# Altium PCB PCB1.PcbDoc
Units mil, origin at the board's own origin, x right, y up, seen from the top; angles counter-clockwise.
Board outline 3800 x 3250 mil, 2 copper layers (Top Layer, Bottom Layer); 24 components, 35 nets, 120 pads, 8 vias.
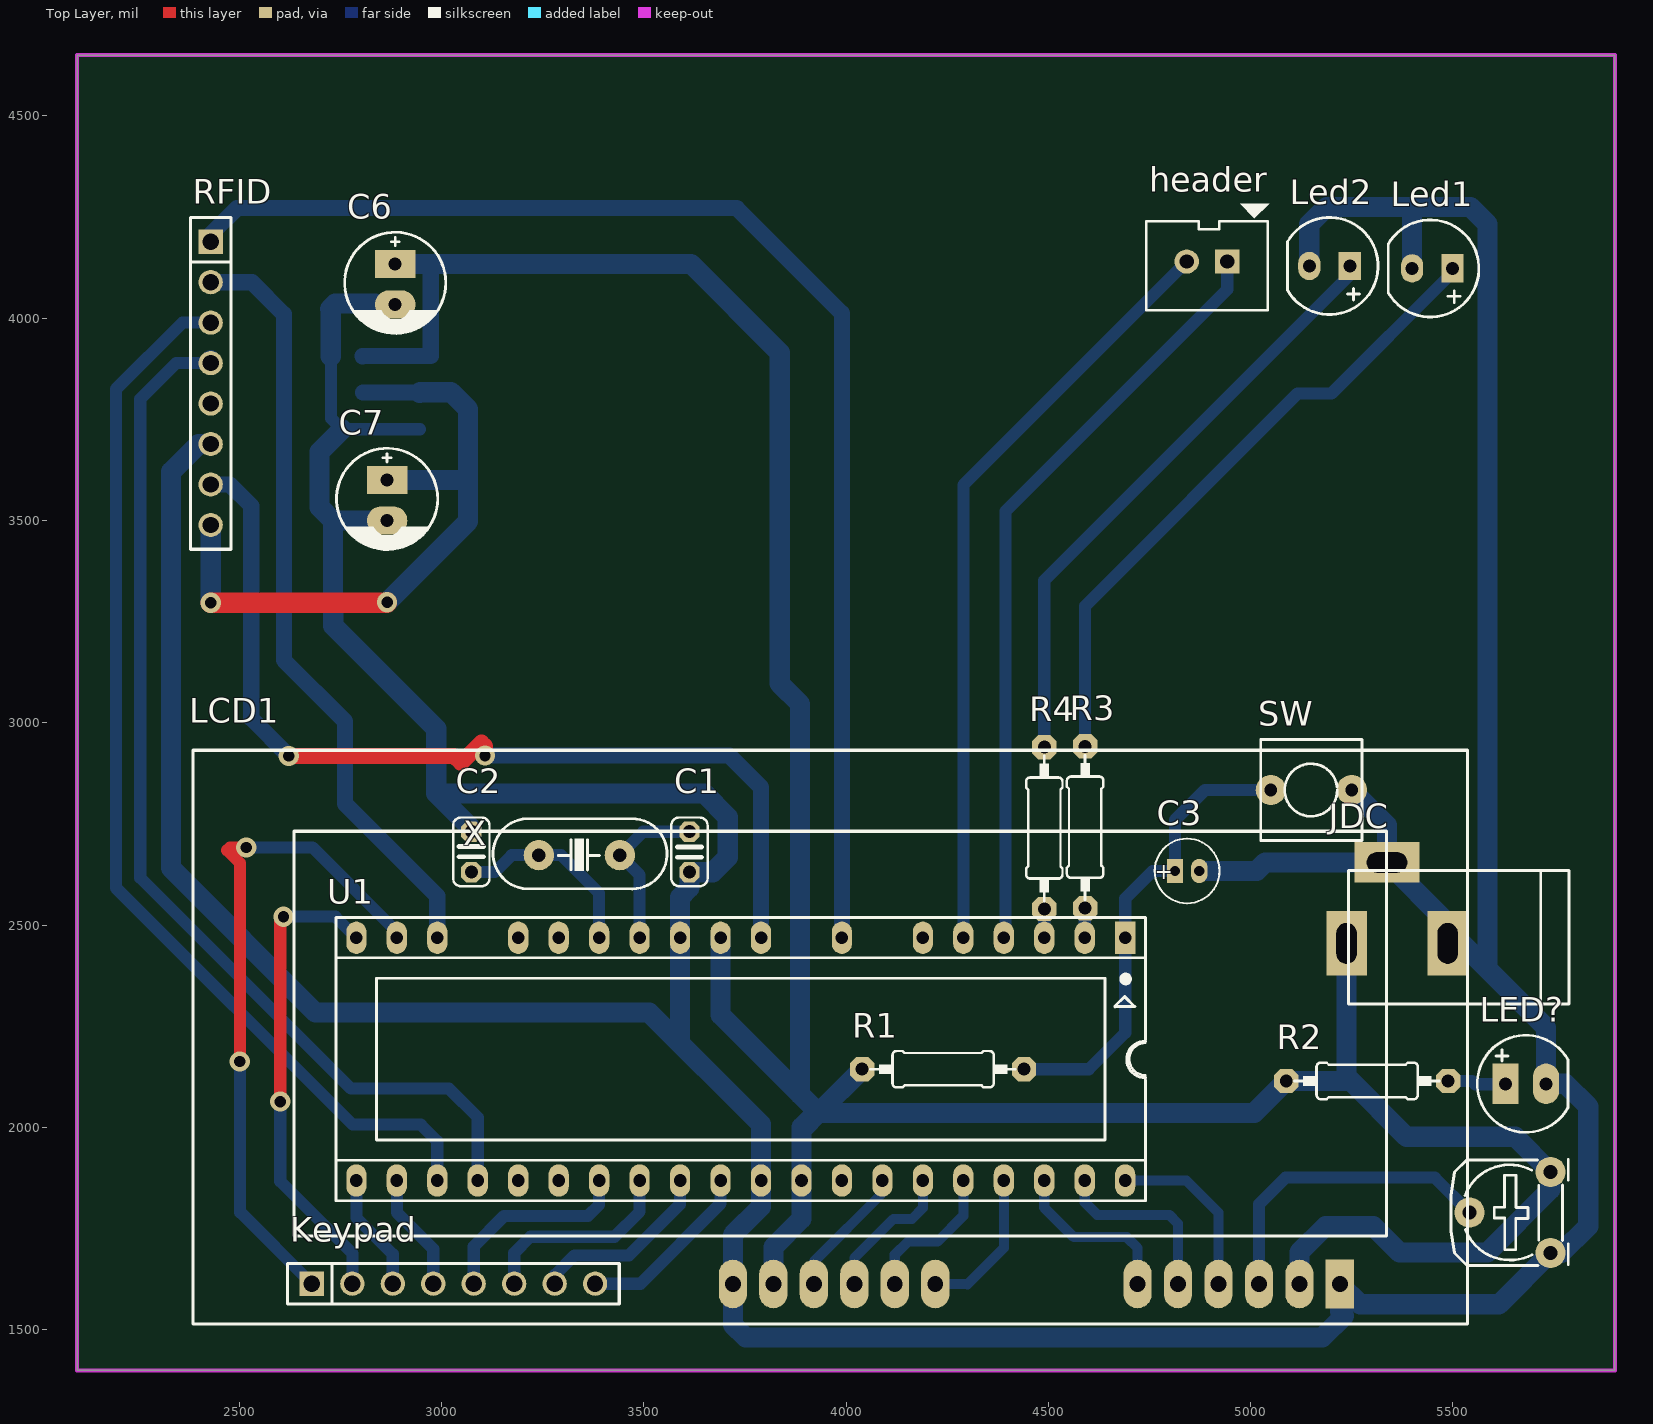
[diagram p0: Top Layer view]
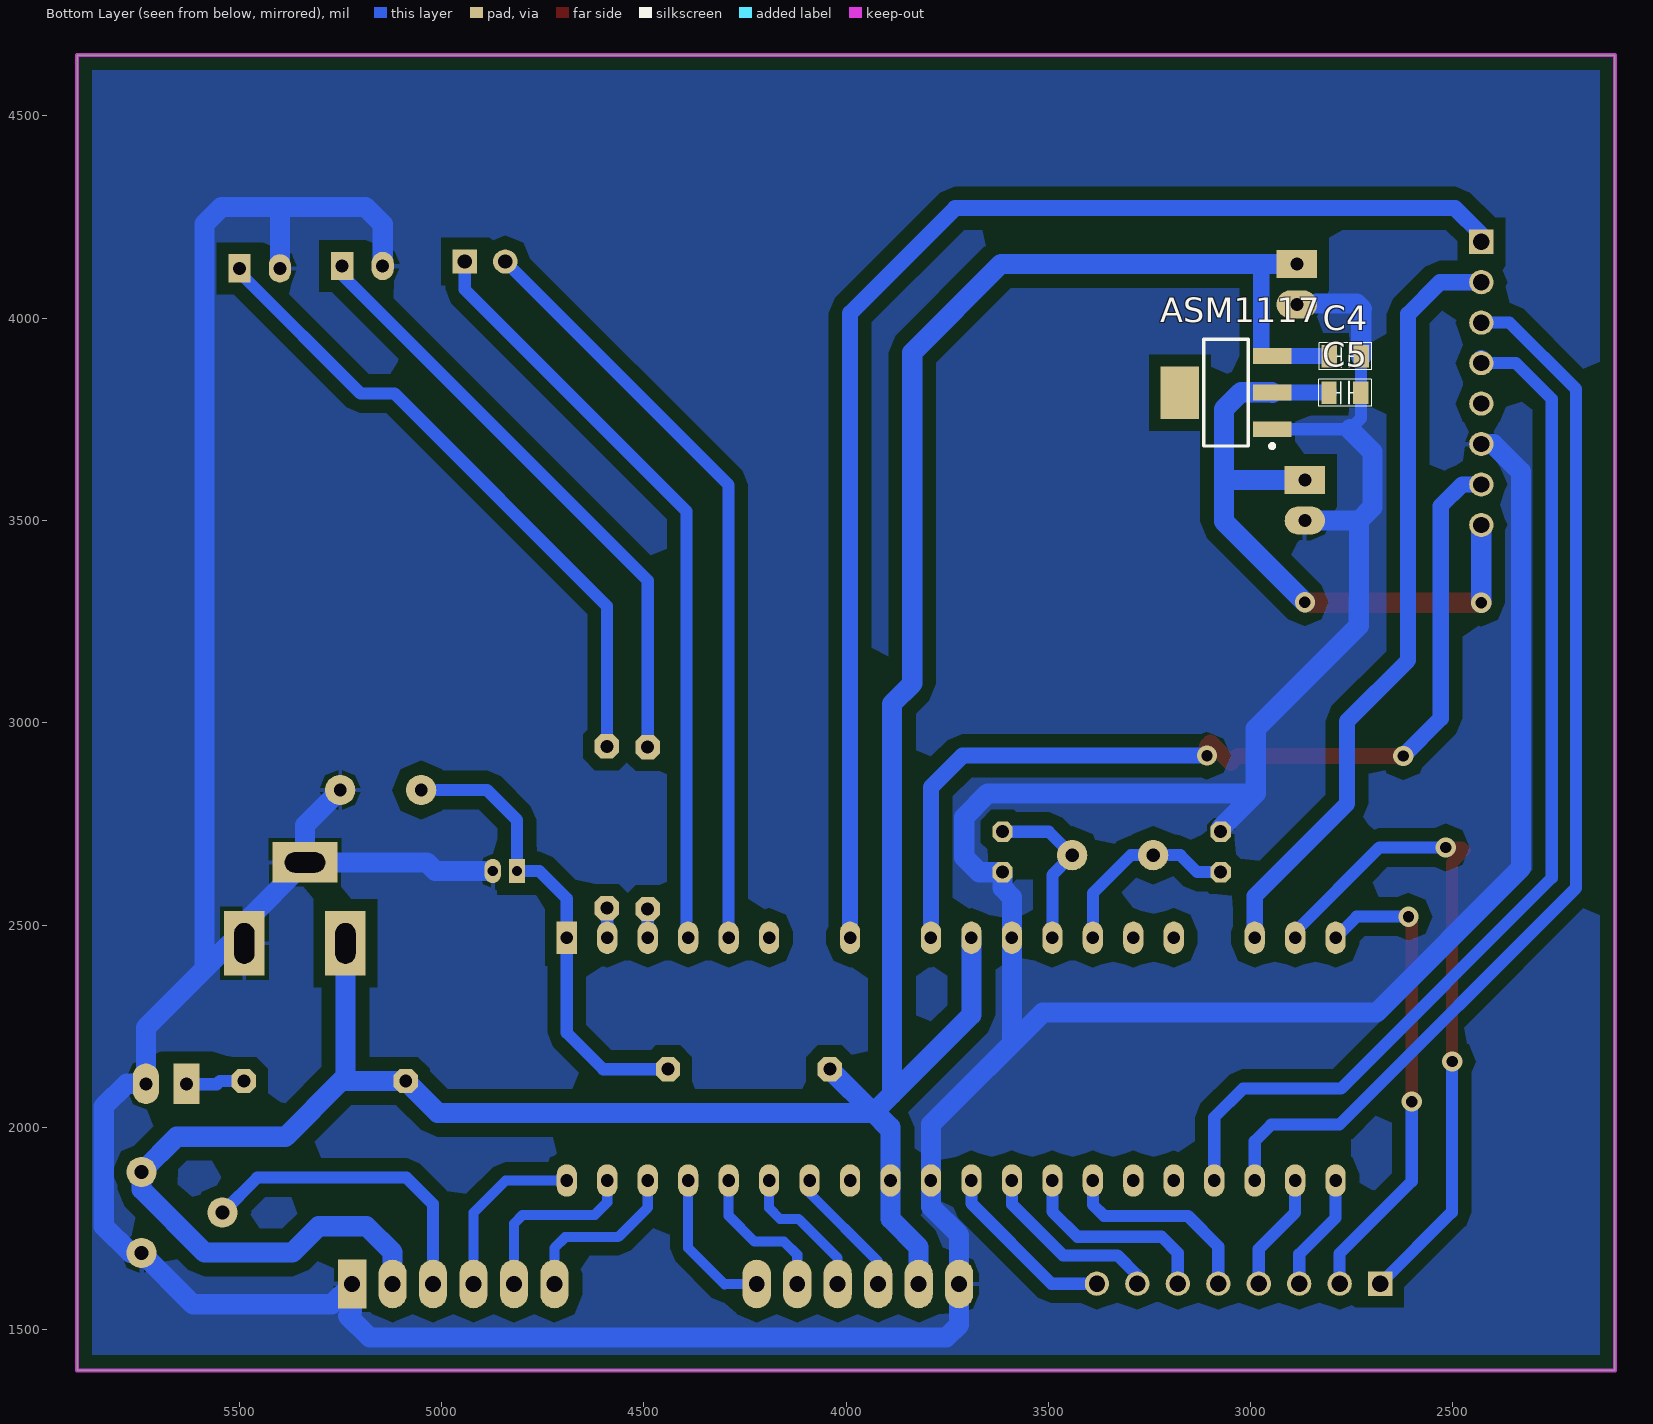
[diagram p1: Bottom Layer view, seen from below]
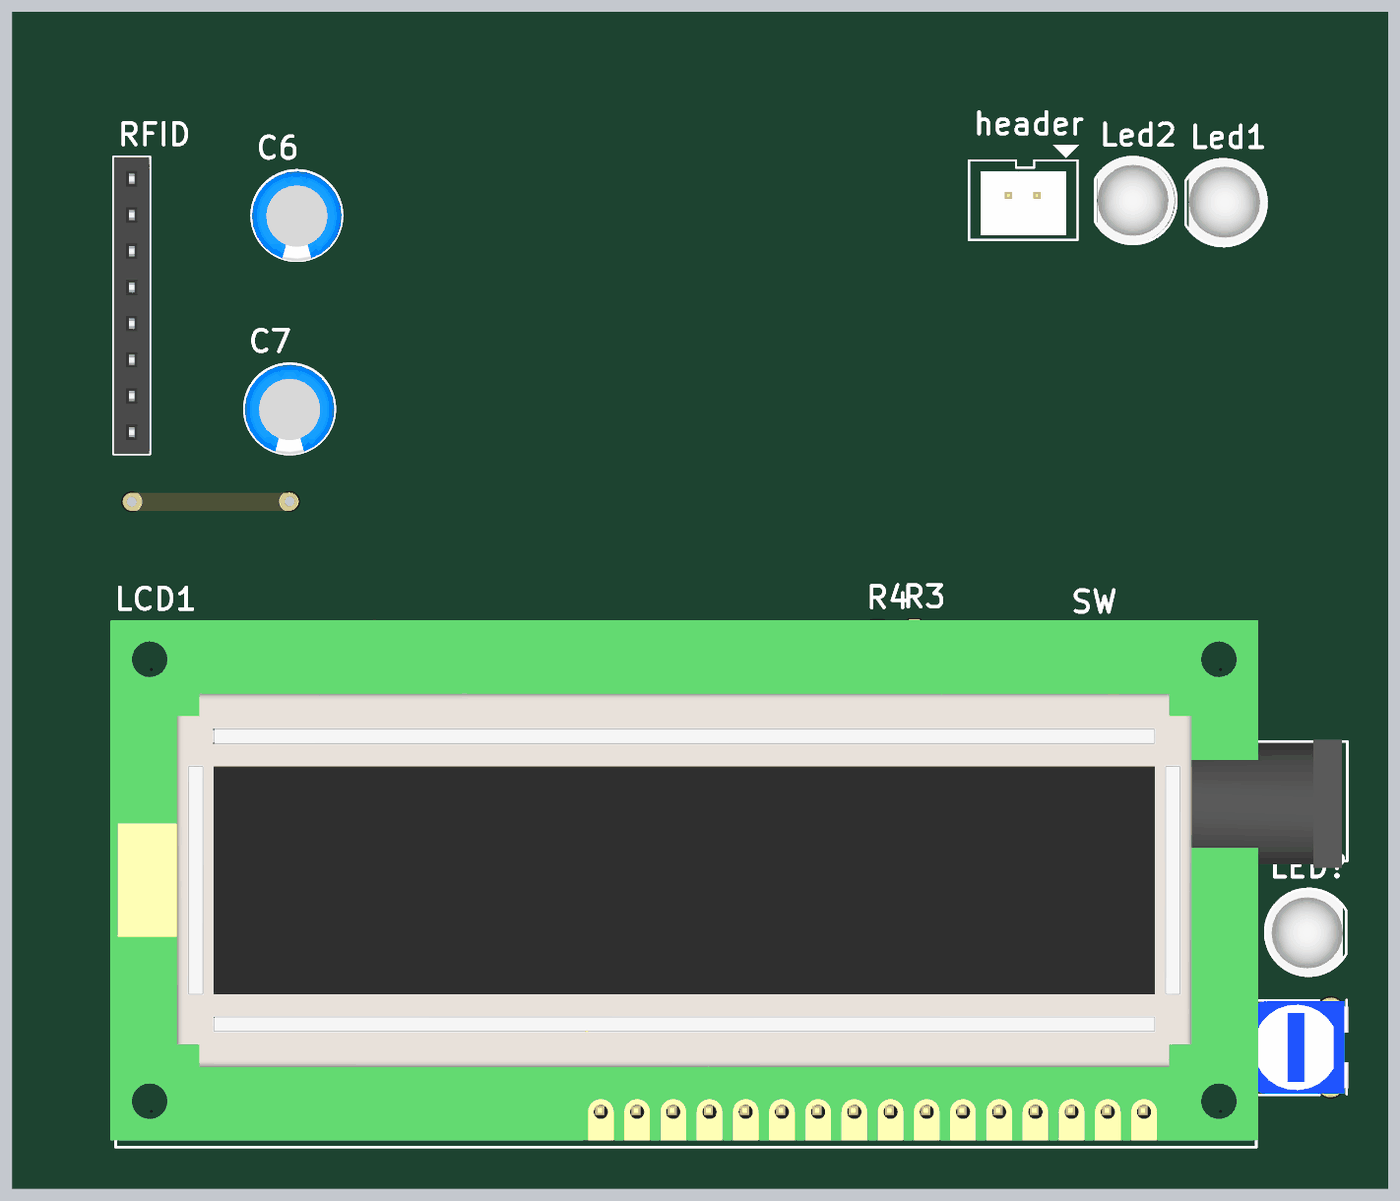
[diagram p2: 3D render of the assembled board from above, using the file's embedded part models]
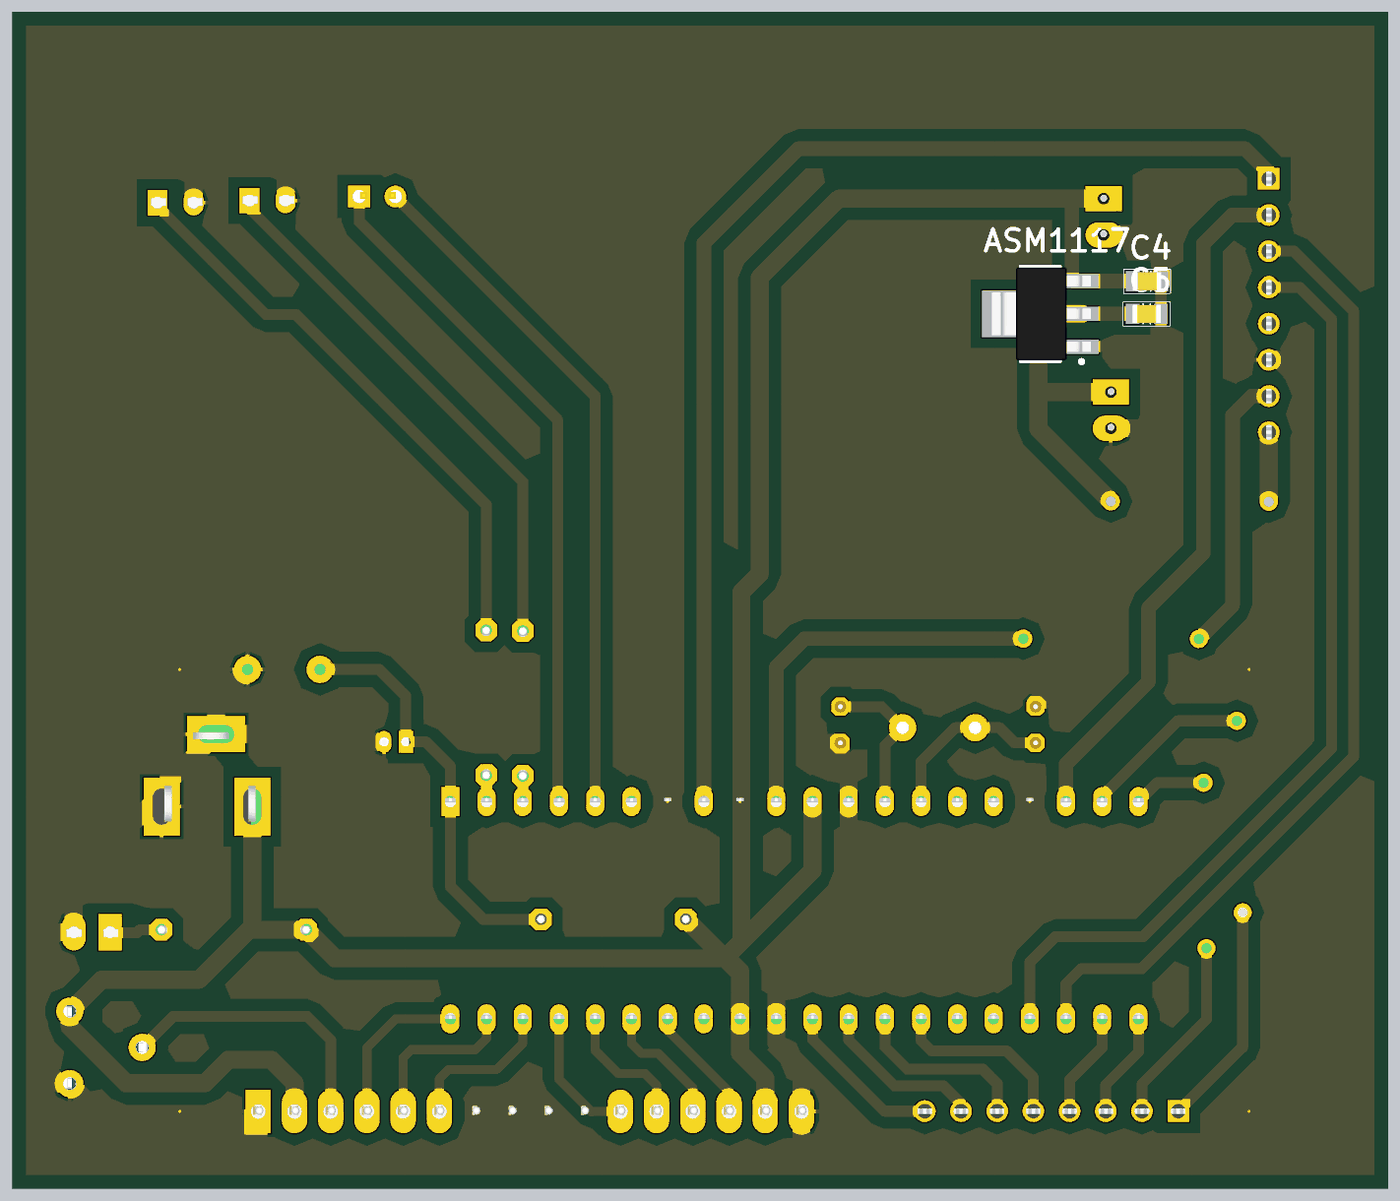
[diagram p3: 3D render of the assembled board from below, using the file's embedded part models]

## Layer stack, top to bottom
Top Solder: solder mask 0.4, Solder Resist, Dk 3.5
Top Layer: signal copper 1.4
Dielectric 1: dielectric 12.6, FR-4, Dk 4.8
Bottom Layer: signal copper 1.4
Bottom Solder: solder mask 0.4, Solder Resist, Dk 3.5

## Board outline
2100,1400 2100,4650 5900,4650 5900,1400

## Design rules (kind name [scope] priority, off if disabled: settings)
Clearance [All] p1: gap=30
PolygonConnect [All] p1: connectstyle=Relief reliefconductorwidth=10 reliefentries=4 polygonreliefangle="90 Angle" airgapwidth=10
RoutingVias [All] p1: holewidth=28 width=50 viastyle="Through Hole" minholewidth=28 minwidth=50 maxholewidth=28 maxwidth=50
SolderMaskExpansion [All] p1: expansion=4
Width [All] p1: maxlimit=50 minlimit=10 preferedwidth=30
30 further rules are at their usual default settings.

## Classes and differential pairs
component class Sheet1: ASM1117 C1 C2 C3 C4 C5 C6 C7 header JDC Keypad LCD1 Led1 Led2 LED? R1 R2 R3 R4 RFID SW

## Components (designator, comment, footprint, x,y, rotation, side; value= is the part's Value field where it differs from the comment)
ASM1117 "" SOT223 3061,3816 r90 bottom
C1 "22p" C025-025,040 3613,2731 r270 top
C2 "22p" C025-025,040 3074,2631 r90 top
C3 "0.1uF" CA-040,015 4813,2634 r0 top
C4 "100nF" C-0805 2766,3906 r180 bottom
C5 "100nF" C-0805 2767,3816 r180 bottom
C6 "100uF" CP1/2.5 2886,4134 r270 top
C7 "100uF" CP1/2.5 2866,3600 r270 top
header "Header2" Header2 5272,4145 r180 top
JDC "Jac DC" DC-IN 5362,2555 r180 top
Keypad "JP8" JP8-C1T 2680,1614 r0 top
LCD1 "LCD16x2A" LCD16X2 5220.55,1613.17 r180 top
Led1 "LEDA" L-5G 5499,4123 r180 top
Led2 "LEDA" L-5R 5245,4129 r180 top
LED? "LED" LED-5-Green 5630,2108 r0 top
R1 "Res" R-025,100 4040,2144 r0 top
R2 "Res" R-025,100 5088,2115 r0 top
R3 "Res" R-025,100 4591,2542 r90 top
R4 "Res" R-025,100 4490,2540 r90 top
RFID "JP8" JP8-C1T 2430,4189 r270 top
SW "" SW2 5050,2834 r0 top
U1 "PIC16F887-I/P" DIP40Q 4690,2469 r180 top
X "" XT2 3341,2673 r0 top
? "" VR-S2 5741,1690 r90 top

## Footprints (in the part's own frame and the unit in brackets; to place one, negate y for a bottom-side part, rotate by r counter-clockwise, add the part's x,y. Pads: shape width x height; smd on the part's side, far side on the other; paste and mask are expansions set on the pad)
C025-025,040 [mil]
  oct 50x50 hole 32: 1(0,0) 2(100,0)
  silkscreen extent -35,-45 135,45, body extent -65,-33 165,33, height 265
C-0805 [mil]
  rect 38x55 smd: 1(-39.36,0.01) 2(39.37,0.01)
  silkscreen extent -65,-34 65,33, body extent -43,-25 43,25, height 50
CA-040,015 [mil]
  rect 40x60 hole 25: 1(0,0)
  oval 40x60 hole 25: 2(60,0)
  silkscreen extent -50,-80 110,80, body extent -49,-80 108,78, height 276
CP1/2.5 [mil] "Tu hoa 33 >100 uF,50V, 220uF/16V,25V"
  rect 70x100 hole 32: 1(0,0)
  oval 70x100 hole 32: 2(100,0)
  silkscreen extent -78,-125 172,125, body extent -76,-124 172,124, height 422
DC-IN [mil] "Jac DC input"
  rect 100x160 hole 50 slot 100 at 90 deg: 1(125,100) 2(-125,100)
  rect 160x100 hole 50 slot 100 at 0 deg: 3(25,-100)
  silkscreen extent -425,-80 120,250, body extent -410,-105 134,269, height 434
DIP40Q [mil] "40 PIN, W 600mil, Pin to pin 100mil"
  rect 50x80 hole 31: 1(0,0)
  oval 50x80 hole 31: 2(100,0) 3(200,0) 4(300,0) 5(400,0) 6(500,0) 8(700,0) 10(900,0) 11(1000,0) 12(1100,0) 13(1200,0) 14(1300,0) 15(1400,0) 16(1500,0) 18(1700,0) 19(1800,0) 20(1900,0) 21(1900,600) 22(1800,600) 23(1700,600) 24(1600,600) 25(1500,600) 26(1400,600) 27(1300,600) 28(1200,600) 29(1100,600) 30(1000,600) 31(900,600) 32(800,600) 33(700,600) 34(600,600) 35(500,600) 36(400,600) 37(300,600) 38(200,600) 39(100,600) 40(0,600)
  round 0 all layers, no hole: 7(600,0) 9(800,0) 17(1600,0)
  silkscreen extent -50,-50 1950,650, body extent -82,-10 1982,600, height 224
Header2 [mil] "CON2"
  rect 60x60 hole 35.43: 1(330,5)
  round 60 hole 35.43: 2(430,5)
  silkscreen extent 227,-137 530,125, body extent 262,-65 498,112, height 236
JP8-C1T [mm] "8 row, straight, gold plating"
  rect 1.52x1.52 hole 1.02: 1(0,0)
  round 1.52 hole 1.02: 2(2.54,0) 3(5.08,0) 4(7.62,0) 5(10.16,0) 6(12.7,0) 7(15.24,0) 8(17.78,0)
  silkscreen extent -1.52,-1.27 19.3,1.27, body extent -1.52,-1.25 19.3,1.25, height 8.51
L-5G [mil] "LED 2 PIN, 5 ly , Only colour,pin to pin 100mil"
  rect 55x70 hole 32: 1(0,0)
  oval 55x70 hole 32: 2(100,0)
  silkscreen extent -65,-120 159,120, body extent -64,-120 150,117, height 339
L-5R [mil] "LED 2 PIN, 5 ly , Only colour,pin to pin 100mil"
  rect 55x70 hole 32: 1(0,0)
  oval 55x70 hole 32: 2(100,0)
  silkscreen extent -70,-120 154,120, body extent -65,-119 149,118, height 339
LCD16X2 [mil] "LCD dipslay 16x2, 16 pin"
  rect 70x120 hole 39.37: 1(0,0)
  oval 70x120 hole 39.37: 2(100,0.02) 3(200,0) 4(300,0) 5(400,0) 6(500,0) 11(1000,0) 12(1100,0) 13(1200,0) 14(1300,0) 15(1400,0) 16(1500,0)
  round 0 all layers, no hole: 7(600,0) 8(700,0) 9(800,0) 10(900,0) M1(-216.54,0) M2(2736.22,0) M3(-216.54,-1220.47) M4(2736.22,-1220.47)
  silkscreen extent -315,-1319 2835,98, body extent -320,-1357 2849,80, height 714
LED-5-Green [mil] "LED 2 PIN, 5 ly , Only colour,pin to pin 100mil"
  rect 65x100 hole 32: 1(0,0)
  oval 65x100 hole 32: 2(100,0)
  silkscreen extent -70,-120 154,120, body extent -69,-120 145,117, height 339
R-025,100 [mil]
  oct 60x60 hole 32: 1(0,0) 2(400,0)
  silkscreen extent 20,-45 378,45, body extent -12,-47 412,47, height 95
SOT223 [mm] "mounted package with increased heatsink; 4  leads"
  rect 1x2.4 smd: 1(-2.3,-2.9) 2(0,-2.9) 3(2.3,-2.9)
  rect 3.3x2.4 smd: 4(0,2.9)
  silkscreen extent -3.47,-3.02 3.35,1.4, body extent -3.25,-3.56 3.25,3.4, height 1.68
SW2 [mil] "SW button 2pin, 250x 250 mil"
  round 75 hole 31: 1(0,0) 2(200,0)
  silkscreen extent -25,-125 225,125
VR-S2 [mil] "Resistor Variable"
  round 75 hole 35: 1(0,0) 2(100,200) 3(200,0)
  silkscreen extent -31,-44 231,246, body extent -28,-50 228,228, height 294
XT2 [mil] "Footpin for Crystal 2 pin"
  round 75 hole 34: 1(-100,0) 2(100,0)
  silkscreen extent -213,-83 217,90, body extent -216,-87 216,90, height 144

## Part data
ASM1117: library part AMS1117-3V3, "800mA Low-Dropout Linear Regulator"
C1 C2 C4 C5: library part CN, "CAP CER 0.047UF 25V X7R 0402"
C3: library part CN-ALU-DIP, "Cap Aluminum Lytic 2200uF 25V 20% (12.5 X 25mm) Radial 5mm 1090mA 2000h 105C Bulk"
C6 C7: library part CP2, "C 47uF/50V , 220uF/16V"
header: "Header IDC, 2 x 1 Pin Vertical 2.54mm Pitch (Non-Boxed, Male)"
JDC: library part DCIN, "Jac DC input"
Keypad RFID: "WR-PHD 2.54 mm Angled Socket Header"
LCD1: library part LCD16x2, "LCD dipslay 16 char, 2 line"
Led1 Led2: "DIALIGHT         5988270107F            LED, Green, SMD, 20 mA, 2 V, 570 nm"
LED?: "LED Single colour Green and Red"
R1 R2 R3 R4: "Thin Film Resistors - SMD 1/4W Regular 2.4Kohm 0.1% 25ppm"
SW: library part SW2, "Switch button 2 pin"
U1: "8-bit Microcontrollers - MCU 14KB Flash 368 RAM 36 I/O"
X: library part XT2, "20MHz ±20ppm Crystal 18pF 40 Ohm -20°C ~ 70°C  Surface Mount HC49/US"
?: library part VR-S, "Var Resistor"

## Via types
v1: diameter 50, hole 28, Top Layer to Bottom Layer, 8 vias

## Nets (pads, with @x,y where several pads share a name; then routed paths per layer and width w, separated by ;. In a path a pad name is that pad's centre, name@x,y a point inside that pad or via, vN(x,y) a via of type N, cw(c..) or ccw(c..) an arc to the next point about the centre after c; other vN are vias at no path point)
3.3V: ASM1117.2 C5.1 C7.1 RFID.8 | length 1667.8
  Top Layer w50: v1(2430,3297) 2865,3297 v1(2866,3298)
  Bottom Layer w40: C5.1 ASM1117.2
  Bottom Layer w50: v1(2430,3297) RFID.8 ; v1(2866,3298) 3066,3498 3066,3605 ; C7.1 3061,3600 3066,3605 ; ASM1117.2 2947.83,3817 3024,3817 3066,3775 3066,3605
COL1: Keypad.1 U1.19 | length 1682.6
  Top Layer w30: v1(2502,2163) 2502,2654 2471,2685 2478,2692 v1(2518,2692)
  Bottom Layer w30: v1(2502,2163) 2502,1790 2503,1791 Keypad.1 ; v1(2518,2692) 2682,2692 2890,2484 U1.19
COL2: Keypad.2 U1.20 | length 1187.2
  Top Layer w30: v1(2602,2064) 2602,2509 2612,2519 v1(2610,2521)
  Bottom Layer w30: v1(2602,2064) 2602,1867 2780,1689 Keypad.2 ; v1(2610,2521) 2738,2521 U1.20
COL3: Keypad.3 U1.21 | length 292.3
  Bottom Layer w30: U1.21 2790,1777 2880,1687 Keypad.3
COL4: Keypad.4 U1.22 | length 292.3
  Bottom Layer w30: U1.22 2890,1790 2980,1700 Keypad.4
CS: RFID.1 U1.8 | length 3255.6
  Bottom Layer w40: RFID.1 2430,4207 2495,4272 3730,4272 3990,4012 U1.8
D4: LCD1.11 U1.37 | length 374.2
  Bottom Layer w25: LCD1.11 4298.83,1613.17 4300,1612 4390,1702 U1.37
D5: LCD1.12 U1.36 | length 368.8
  Bottom Layer w25: LCD1.12 4120.55,1685.55 4153,1718 4226,1718 4290,1782 U1.36
D6: LCD1.13 U1.35 | length 353
  Bottom Layer w25: LCD1.13 4020.55,1677.55 4117,1774 4163,1774 4190,1801 U1.35
D7: LCD1.14 U1.34 | length 326
  Bottom Layer w25: LCD1.14 3920.55,1668.55 4090,1838 U1.34
EN: LCD1.6 U1.38 | length 428.1
  Bottom Layer w25: U1.38 4490,1802 4563,1729 4694,1729 4720.55,1702.45 LCD1.6
GND: ?.1 ASM1117.1 C1.2 C2.2 C3.2 C4.2 C5.2 C6.2 C7.2 JDC.2 JDC.3 LCD1.1 LCD1.16 Led1.2 Led2.2 LED?.2 RFID.6 SW.2 U1.12 U1.31 | length 13433.2
  Bottom Layer w30: C4.2 2727.63,3905.01 C5.2 2727.63,3752.37 2754.55,3725.45 ASM1117.1
  Bottom Layer w50: RFID.6 2400,3689 2332,3621 2332,2640.99 2688.99,2284 3514,2284 3790,2008 U1.31 3790,1804 3720.55,1734.55 LCD1.16 3720.55,1512.45 3752,1481 5177,1481 5231,1535 5220.55,1545.45 LCD1.1 5270.72,1563 5614,1563 ?.1 5768,1690 5834,1756 5834,2052 5778,2108 LED?.2 5730,2247 5581.5,2395.5 ; C4.2 2726.63,4021.37 2725,4023 2738,4036 C6.2@2837,4036 ; 2754.55,3725.45 2699,3669.9 2699,3533 2732,3500 ; C7.2 2732,3500 ; C2.2 3074,2739 2987.5,2825.5 ; 3590,2208 U1.12 3590,2569 3613,2592 C1.2 3671,2631 3708,2668 3708,2767 3649.5,2825.5 2987.5,2825.5 ; C3.2@4888,2634 5015,2634 5036,2655 JDC.3 ; Led2.2 5145,4232 5188,4275 5404,4275 ; SW.2 5337,2747 JDC.3 ; JDC.3@5316,2634 JDC.3 ; Led1.2 5399,4270 5404,4275 ; 2732,3500 2732,3307 2733,3306 2733,3240 2987.5,2985.5 2987.5,2825.5 ; JDC.3 5487,2505 JDC.2 5522,2455 5581.5,2395.5 ; 5404,4275 5543,4275 5585,4233 5585,2399 5581.5,2395.5
H1: header.1 U1.4 | length 1902
  Bottom Layer w30: U1.4 4394,2469 4394,3523 4942,4071 header.1
H2: header.2 U1.5 | length 1899.6
  Bottom Layer w30: U1.5 4290,3588 header.2
JQR: RFID.5
L1: R3.1 U1.2 | length 73.4
  Bottom Layer w30: U1.2 4590,2541 R3.1
L2: R4.1 U1.3 | length 71
  Bottom Layer w30: U1.3 R4.1
MISO: RFID.4 U1.24 | length 2641.5
  Bottom Layer w30: RFID.4 2345,3889 2256,3800 2256,2616.85 2776.85,2096 3019,2096 3090,2025 U1.24
  Bottom Layer w40: RFID.4 RFID.4@2430,3901.29
MOSI: RFID.3 U1.23 | length 2685.1
  Bottom Layer w30: RFID.3 2360.15,3989 2196,3824.85 2196,2592 2781,2007 2949,2007 2990,1966 U1.23
Net_2: ?.2 LCD1.3 | length 780.6
  Bottom Layer w30: LCD1.3 5020.55,1810.55 5086,1876 5455,1876 ?.2
NetLed1_1: Led1.1 R3.2 | length 1612.5
  Bottom Layer w30: R3.2 4591,3289 5116,3814 5200.03,3814 5488.5,4102.47 5488.5,4123 Led1.1
NetLed2_1: Led2.1 R4.2 | length 1501.7
  Bottom Layer w30: R4.2 4490,3352 5245,4107 Led2.1
NetLED?_1: LED?.1 R2.2 | length 145.7
  Bottom Layer w30: R2.2 5547,2115 5555,2107 5629,2107 LED?.1
ROW1: Keypad.5 U1.27 | length 504.7
  Bottom Layer w30: Keypad.5 3080,1706 3155,1781 3362,1781 3390,1809 U1.27
ROW2: Keypad.6 U1.28 | length 505.2
  Bottom Layer w30: Keypad.6 3180,1690 3220,1730 3428,1730 3490,1792 U1.28
ROW3: Keypad.7 U1.29 | length 462.5
  Bottom Layer w30: Keypad.7 3280,1635 3329,1684 3464,1684 3590,1810 U1.29
ROW4: Keypad.8 U1.30 | length 449
  Bottom Layer w30: Keypad.8 3492,1614 3690,1812 U1.30
RS: LCD1.4 U1.40 | length 439.8
  Bottom Layer w25: U1.40 4841,1869 4920.55,1789.45 LCD1.4
RST: C3.1 R1.2 SW.1 U1.1 | length 1164.1
  Bottom Layer w30: R1.2 4600,2144 4690,2234 U1.1 4690,2566 4758,2634 C3.1 4813,2760 4887,2834 SW.1
RST': RFID.7 U1.10 | length 2404.3
  Top Layer w40: v1(2623,2918) 3032,2918 3049,2901 3099,2951 3108,2942 v1(3108,2919)
  Bottom Layer w40: RFID.7 2477,3589 2530,3536 2530,3011 v1(2623,2918) ; v1(3108,2919) 3712,2919 3790,2841 U1.10
RW: LCD1.5 U1.39 | length 455.6
  Bottom Layer w25: U1.39 4590,1815 4621,1784 4799,1784 4820.55,1762.45 LCD1.5
SCK: RFID.2 U1.18 | length 1911.7
  Bottom Layer w40: RFID.2 2532,4089 2611,4010 2611,3155 2762,3004 2762,2800 2990,2572 U1.18
VCC: ?.3 ASM1117.3 C4.1 C6.1 JDC.1 LCD1.2 LCD1.15 R1.1 R2.1 U1.11 U1.32 | length 7638
  Bottom Layer w40: C4.1 2805.91,3906.55 ASM1117.3 2974,3906.55 2974,4130 2970,4134
  Bottom Layer w50: C6.1 2970,4134 3617,4134 3836,3915 3836,3097 3886.5,3046.5 3886.5,2081.5 ; U1.11 3690,2278 3886.5,2081.5 ; LCD1.15 3820.55,1704.55 3890,1774 U1.32 3890,2001 3928.5,2039.5 3886.5,2081.5 ; 3894,1998 3932,2036 ; R1.1 3932,2036 ; LCD1.2 5120.55,1691.55 5185,1756 5303,1756 5368,1691 5585,1691 5741,1847 ?.3 5654,1977 5385,1977 5247,2115 ; JDC.1 5237,2125 5247,2115 ; 3932,2036 5009,2036 R2.1 5247,2115
XTAL1: C1.1 U1.13 X.2 | length 420.3
  Bottom Layer w30: U1.13 3490,2624 X.2 3499,2731 C1.1
XTAL2: C2.1 U1.14 X.1 | length 482.3
  Bottom Layer w30: C2.1 3132,2631 3174,2673 X.1 3296,2673 3390,2579 U1.14
pads on no net: ASM1117.4 LCD1.7 LCD1.8 LCD1.9 LCD1.10 LCD1.M1 LCD1.M2 LCD1.M3 LCD1.M4 U1.6 U1.7 U1.9 U1.15 U1.16 U1.17 U1.25 U1.26 U1.33

## Polygon pours and split planes (outlines as drawn)
GND on Bottom Layer "dong" (solid, pour order 0): 2100,4650 2100,1400 5900,1400 5900,4650

## Keep-outs
Keep-Out Layer:
  the board outline again, w10

## Text inside footprints (layer, text, board x,y; h text height)
C3: Top Overlay "+" at 4763,2614 h40